# EAGLE board PCB_Gabri1.1 (EAGLE 7.6.0)
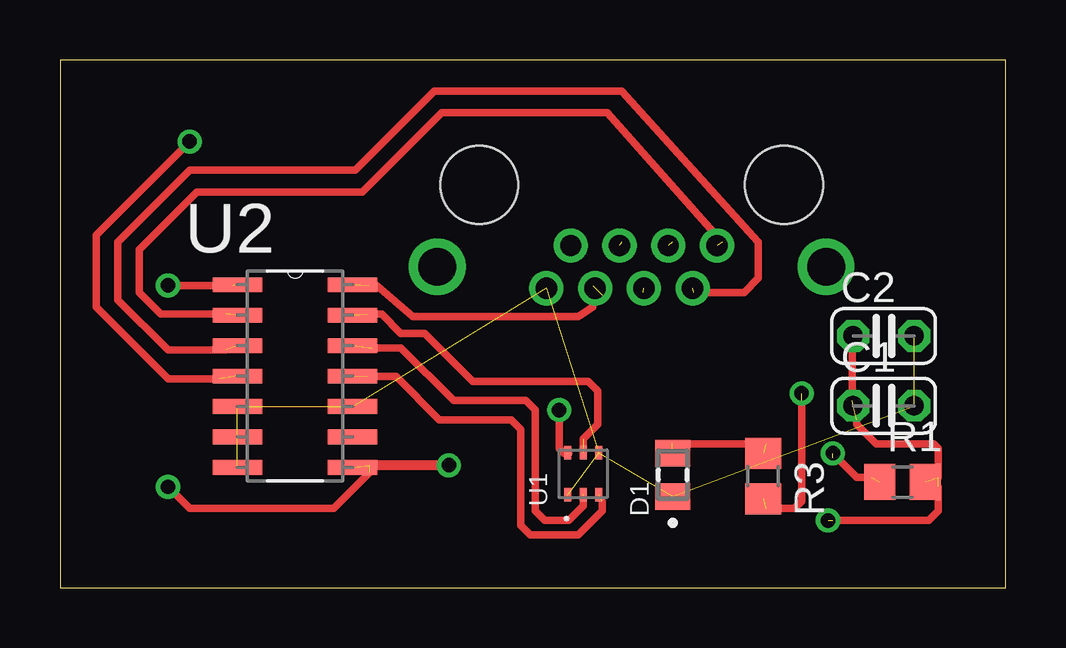
[diagram p0: board, top side]
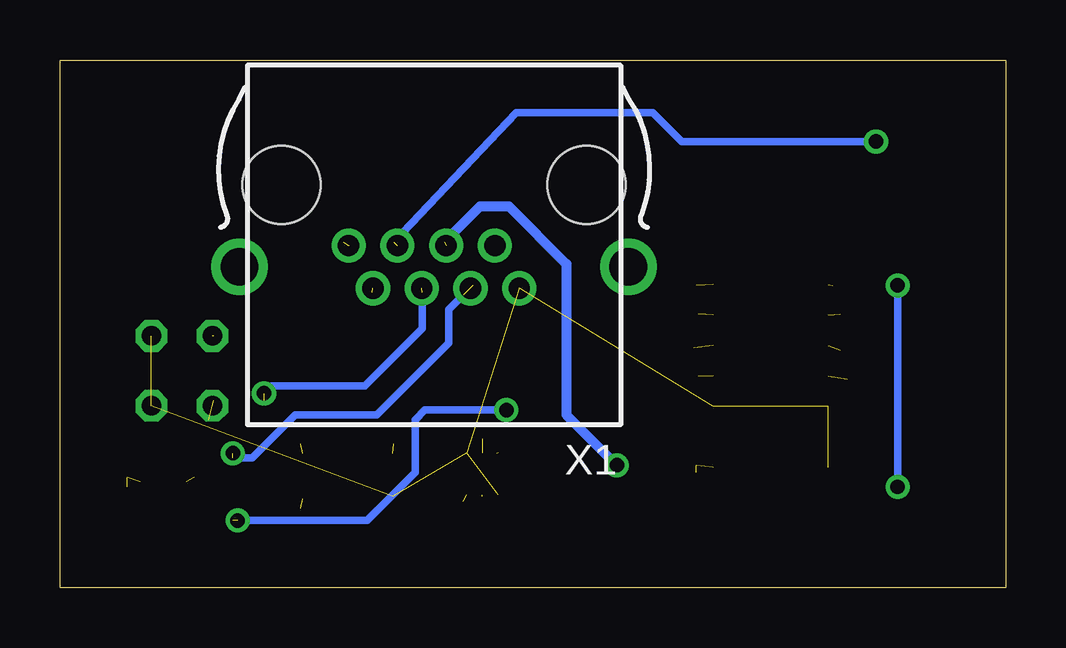
[diagram p1: board, bottom side, seen from below]

Size 39.4 x 22 mm. Coordinates in mm from the lower left corner, seen from the top.
Outline: 0,0 39.4,0 39.4,22 0,22 0,0
Copper layers (1*16): Top 0.035mm / dielectric 1.5mm / Bottom 0.035mm
Design rules "default": minimum track width 10mil, minimum drill 24mil, track to track 8mil, track to pad 8mil, pad to pad 8mil, via to via 8mil, smd to smd 8mil, copper to edge 40mil, drill to drill 8mil, minimum pad ring 10mil, minimum via ring 8mil, stop-mask expansion 4mil, vias tented up to drill 0mil, thermal gap 10mil

## Footprints (pad centres in the part's own frame; a part is rotated, then mirrored left to right if it is on the bottom)
C025-024X044 = drill 0.813 octagon: 1 -1.27,0; 2 1.27,0
LEDC2012X70N = smd 1.1 x 1.45: A 0.9,0; C -0.9,0
R0805 = smd 1.3 x 1.5: 1 -0.95,0; 2 0.95,0
VISHAY_VEML6030_2X2X0.87 = smd 0.55 x 0.3: 1 -0.875,0.65; 2 -0.875,0; 3 -0.875,-0.65; 4 0.875,-0.65; 5 0.875,0; 6 0.875,0.65
SOIC127P600X175-14N = smd 2.057 x 0.61: 1 -4.801,7.62; 2 -4.801,6.35; 3 -4.801,5.08; 4 -4.801,3.81; 5 -4.801,2.54; 6 -4.801,1.27; 7 -4.801,0; 8 0,0; 9 0,1.27; 10 0,2.54; 11 0,3.81; 12 0,5.08; 13 0,6.35; 14 0,7.62
0446200002 = drill 0.889 pad 1.422: 1 3.556,2.54; 2 2.54,4.318; 3 1.524,2.54; 4 0.508,4.318; 5 -0.508,2.54; 6 -1.524,4.318; 7 -2.54,2.54; 8 -3.556,4.318 | drill 1.575 pad 2.286: S@1 -8.103,3.429; S@2 8.103,3.429 | hole 3.251: 6.35,0; -6.35,0

## Placement (x,y rotation side)
C1  [C025-024X044]  34.32,7.58 0 top
C2  [C025-024X044]  34.32,10.49 0 top
D1  5988170107F  [LEDC2012X70N]  25.53,4.7 90 top
R1  [R0805]  35.1,4.4 0 top
R3  [R0805]  29.3,4.65 270 top
U1  VEML6030  [VISHAY_VEML6030_2X2X0.87]  21.8,4.75 90 top
U2  TXS0104ED  [SOIC127P600X175-14N]  12.19,5.01 0 top
X1  0446200002  [0446200002]  23.82,16.8 180 bottom

## Library data of the parts
C1 C2 R1 R3 = resistor
D1 = 5988170107F; AVAILABILITY: Unavailable; DESCRIPTION: LED GREEN CLEAR 0805 SMD; MF: Dialight; MP: 5988170107F; PACKAGE: 0805 Dialight; PRICE: None
U1 = VEML6030; AVAILABILITY: Unavailable; DESCRIPTION: VEML6030 Series 2 x 2 x 0.85 mm 50 mW I2C High Accuracy Ambient Light Sensor; MF: Vishay; MP: VEML6030; PACKAGE: SMD-6 Vishay; PRICE: None
U2 = TXS0104ED; AVAILABILITY: Unavailable; DESCRIPTION: 4-Bit Bidirectional Voltage-Level Shifter for Open-Drain and Push-Pull Applications 14-SOIC -40 to 85; MF: Texas Instruments; MP: TXS0104ED; PACKAGE: SOIC-14 Texas Instruments; PRICE: None
X1 = 0446200002; AVAILABILITY: Unavailable; DESCRIPTION: Conn RJ-45 RCP 8 POS 2.04mm Solder RA Thru-Hole 8 Terminal 1 Port Tray Cat 3; MF: Molex, LLC; MP: 0446200002; PACKAGE: None; PRICE: None

## Nets
A1: U2.2 X1.1
A2: U2.3 X1.2
A3: U2.4 X1.3
GND: C1.2 C2.2 D1.C U1.1 U1.4 U2.5 U2.7 U2.10 X1.8
INT: U1.3 U2.11
LED_1: R3.2 X1.4
LED_2: D1.A R3.1
LS_VDD: C1.1 C2.1 R1.2 U1.6
SCL: U1.5 U2.13
SDA: U1.2 U2.12
VCCA: U2.1 U2.8 X1.5
VCCB: R1.1 U2.14 X1.6

## Tracks (layer width: path | path; a pad name or v marks a point on that pad's centre or on a via)
A1  (2 unrouted)
  Top 0.305: 6.9,11.4 4.2,11.4 3.3,12.3 3.3,14.1 5.7,16.5 12.6,16.5 15.9,19.8 22.8,19.8 27.6,14.4
A2  (2 unrouted)
  Top 0.305: 6.9,9.9 4.5,9.9 2.4,12 2.4,14.4 5.4,17.4 12.3,17.4 15.6,20.7 23.4,20.7 29.1,14.4 29.1,12.9 28.5,12.3 26.4,12.3
A3  (via drill 0.6)  (2 unrouted)
  Top 0.305: 6.6,8.7 4.5,8.7 1.5,11.7 1.5,14.7 v5.4,18.6
  Bottom 0.305: v5.4,18.6 13.5,18.6 14.7,19.8 20.4,19.8 25.5,14.4
GND  (8 unrouted)
INT  (2 unrouted)
  Top 0.305: 22.6,3.6 22.6,3.2 21.6,2.2 19.6,2.2 19.2,2.6 19.2,6.6 18.8,7 15.8,7 14,8.8 12.8,8.8
LED_1  (via drill 0.6)  (3 unrouted)
  Top 0.305: 30.9,7.8 30.9,3.6 30.6,3.3 29.4,3.3
  Bottom 0.305: 24.3,12.3 24.3,10.8 26.7,8.4 30.6,8.4 v30.9,8.1
LED_2  (2 unrouted)
  Top 0.305: 25.5,6 29.4,6
LS_VDD  (via drill 0.6)  (7 unrouted)
  Top 0.305: 21.2,5.6 21,5.6 20.8,5.8 v20.8,7.4 | 32.2,2.8 36.2,2.8 36.6,3.2 36.6,4.2 | 33.2,7 33.2,6.8 34,6 36.4,6 36.6,5.8 36.6,4.6 | 33,7.8 33,10.5
  Bottom 0.305: v20.8,7.4 24.2,7.4 24.6,7 24.6,4.8 26.6,2.8 v32,2.8
SCL  (2 unrouted)
  Top 0.305: 12.8,11.4 13.4,11.4 14.2,10.6 15.2,10.6 17.2,8.6 22,8.6 22.4,8.2 22.4,6.8 21.8,6.2 21.8,5.8
SDA  (2 unrouted)
  Top 0.305: 21.8,3.8 21.8,3.4 21.2,2.8 20.2,2.8 19.8,3.2 19.8,7.4 19.4,7.8 16.4,7.8 14.2,10 13,10
VCCA  (via drill 0.6)  (4 unrouted)
  Top 0.305: 7.2,12.6 v4.5,12.6 | v4.5,4.2 5.4,3.3 11.4,3.3 12.9,4.8
  Top 0.406: v16.2,5.1 12.9,5.1
  Bottom 0.305: v4.5,12.6 v4.5,4.2
  Bottom 0.406: 23.4,14.4 21.9,15.9 20.7,15.9 18.3,13.5 18.3,7.2 v16.2,5.1
VCCB  (via drill 0.6)  (5 unrouted)
  Top 0.305: 22.2,12.6 22.2,11.7 21.6,11.3 14.7,11.3 13.2,12.6 12.9,12.6 | 33.8,4.6 33.2,4.6 v32.2,5.6
  Bottom 0.305: 32.2,5.4 31.4,5.4 29.6,7.2 26.2,7.2 23.2,10.2 23.2,11.6 22.6,12.2